# Altium PCB Tube_Driver.PcbDoc (part 2 of 2)
Units mm, origin at the board's own origin, x right, y up, seen from the top; angles counter-clockwise.
Board outline 113 x 87.5 mm, 2 copper layers (Top Layer, Bottom Layer); 135 components, 76 nets, 317 pads, 176 vias.
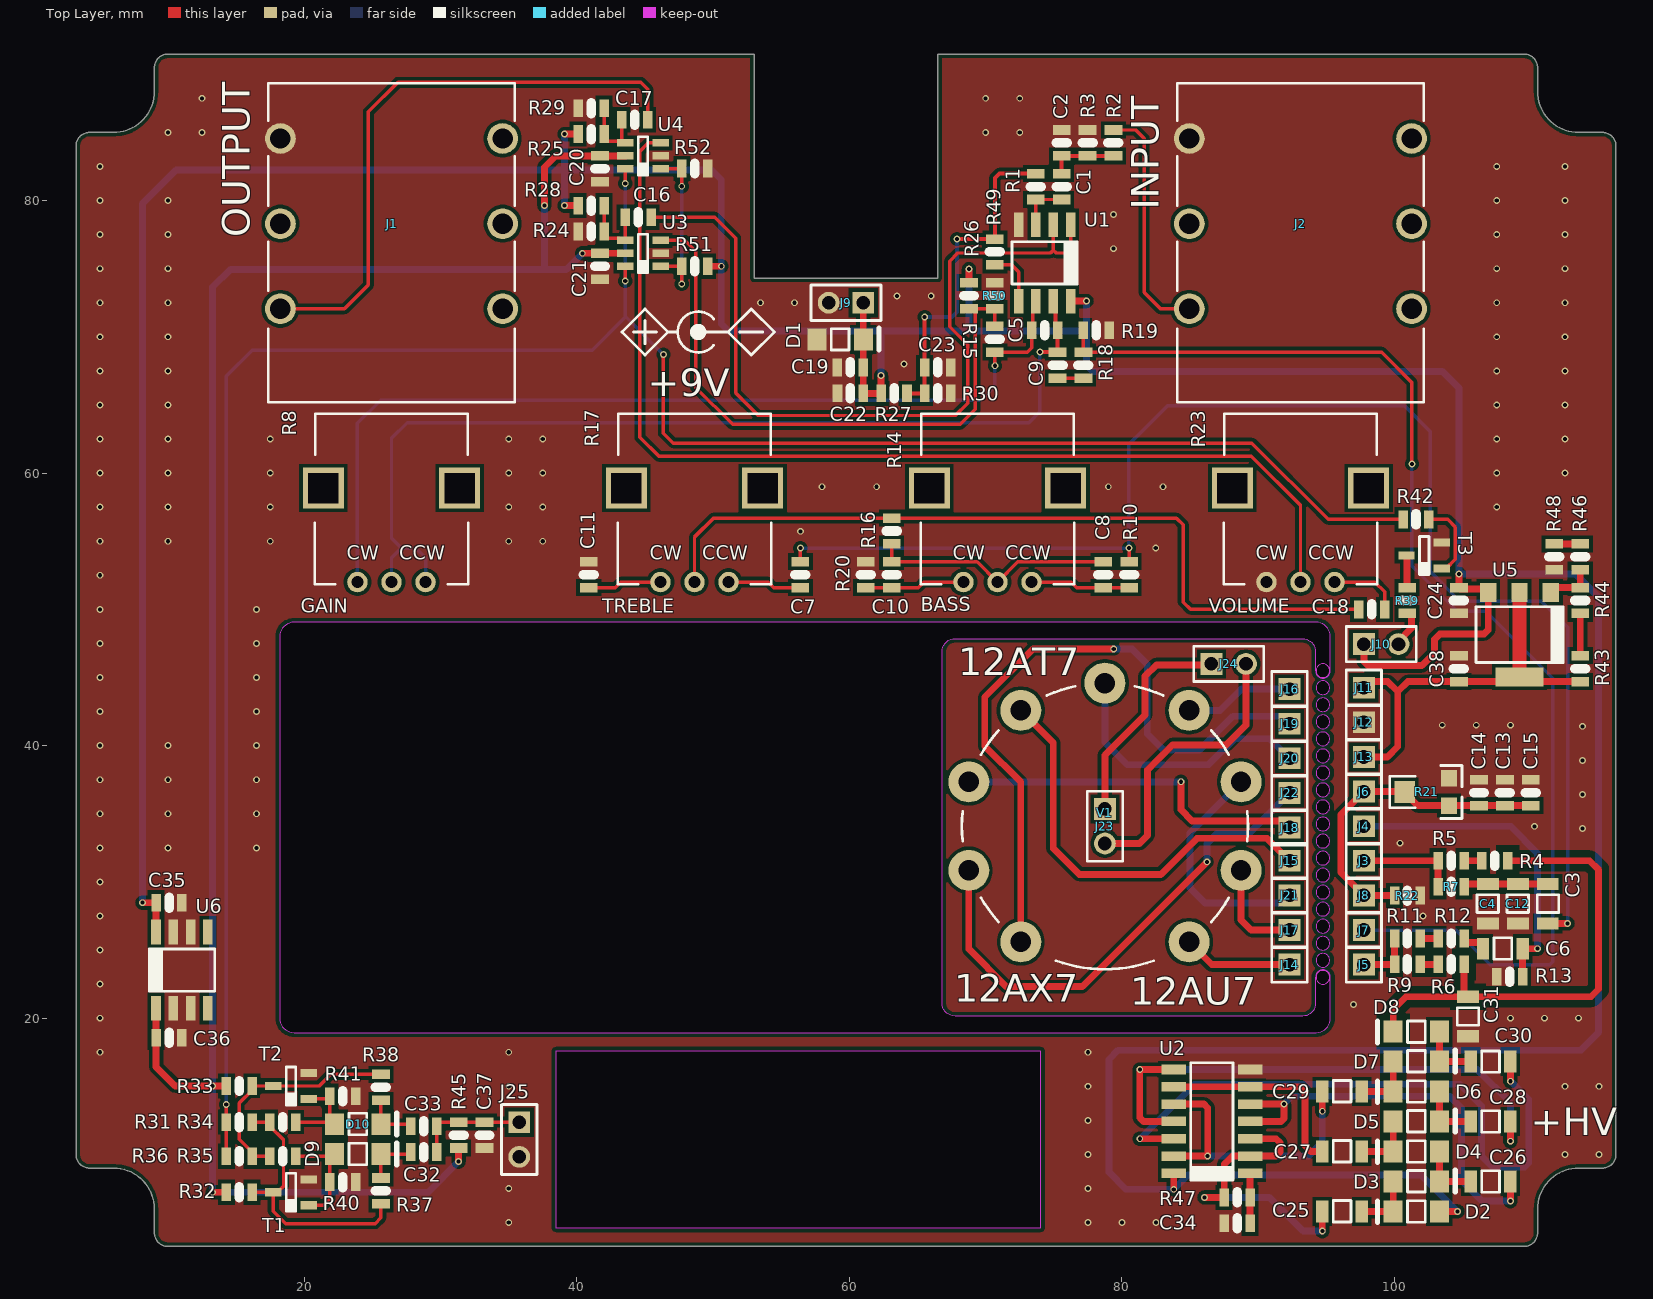
[diagram p0: Top Layer view]

## Via types
v1: diameter 0.5, hole 0.3, Top Layer to Bottom Layer, 176 vias

## Nets (pads, with @x,y where several pads share a name; then routed paths per layer and width w, separated by ;. In a path a pad name is that pad's centre, name@x,y a point inside that pad or via, vN(x,y) a via of type N, cw(c..) or ccw(c..) an arc to the next point about the centre after c; other vN are vias at no path point) (continued)
SET: (continued)
  Top Layer w0.254: R36.2 R31.2 v1(14.275,13.675) ; v1(43.55,74.1) U3.6 ; v1(43.55,81.25) U4.6 ; v1(46.35,68.7) 46.35,62.925 47.075,62.2 89.525,62.2 95.125,56.6 R42.1
  Bottom Layer w0.254: v1(14.275,13.675) 14.275,67.125 16.175,69.025 41.125,69.025 43.55,71.45 v1(43.55,74.1) v1(43.55,81.25) ; 43.55,71.5 v1(46.35,68.7)
pads on no net: J1.2 J1.4 J1.5 J1.6 J2.2 J2.4 J2.5 J2.6 R8. R14. R17. R23. U6.4 U6.5

## Polygon pours and split planes (outlines as drawn)
GND on Top Layer "GND_TOP" (solid, pour order 0): 0,0 120,0 120,95 0,95
GND on Bottom Layer "GND_bottom" (solid, pour order 1): 0,0 120,0 120,95 0,95

## Silkscreen, mask and mechanical layers (free items; w line width, h text height)
Top Overlay:
  circle w1: c48.9,70.35 r0.1
  lines w0.2: 44.15,70.35 45.85,70.35 ; 45,69.5 45,71.2 ; 47.4,70.35 46.7,70.35 ; 48.9,70.35 51.1,70.35 ; 50.049,69.386 cw(c48.9,70.35) 50.049,71.314 ; 51.95,70.35 53.65,70.35 ; 46.7,70.35 45,72.05 43.3,70.35 45,68.65 46.7,70.35 ; 51.1,70.35 52.8,68.65 54.5,70.35 52.8,72.05 51.1,70.35
  text "INPUT" at 82.695,79.305 h2.03 r90
  text "OUTPUT" at 15.995,77.305 h2.03 r90
  text "+9V" at 45.205,65.655 h2.03
  text "BASS" at 65.219,49.852 h1.02
  text "GAIN" at 19.752,49.752 h1.02
  text "TREBLE" at 41.852,49.752 h1.02
  text "VOLUME" at 86.352,49.752 h1.02
  text "12AT7" at 68.005,45.18 h2.03
  text "12AX7" at 67.705,21.205 h2.03
  text "12AU7" at 80.605,21.005 h2.03
  text "+HV" at 110.005,11.405 h2.03
Top Solder:
  text "P: LAMPA V2" at 8.402,44.188 h1.52 r90
  text "D: M.K" at 11.402,44.188 h1.52 r90
  text "09.01.2024" at 14.402,44.188 h1.52 r90
Outline:
  circle w0.1: c94.75,23 r0.5
  circle w0.1: c94.75,26.75 r0.5
  circle w0.1: c94.75,25.5 r0.5
  circle w0.1: c94.75,24.25 r0.5
  circle w0.1: c94.75,30.5 r0.5
  circle w0.1: c94.75,29.25 r0.5
  circle w0.1: c94.75,28 r0.5
  circle w0.1: c94.75,34.25 r0.5
  circle w0.1: c94.75,33 r0.5
  circle w0.1: c94.75,31.75 r0.5
  circle w0.1: c94.75,35.5 r0.5
  circle w0.1: c94.75,36.75 r0.5
  circle w0.1: c94.75,38 r0.5
  circle w0.1: c94.75,39.25 r0.5
  circle w0.1: c94.75,40.5 r0.5
  circle w0.1: c94.75,41.75 r0.5
  circle w0.1: c94.75,43 r0.5
  circle w0.1: c94.75,44.25 r0.5
  circle w0.1: c94.75,45.5 r0.5
  pour cut-out: 94.25,45.5 ccw(c94.75,45.5) 94.75,45 ccw(c94.75,45.5) 95.25,45.5 ccw(c94.75,45.5) 94.75,46 ccw(c94.75,45.5)
  pour cut-out: 94.25,30.5 ccw(c94.75,30.5) 94.75,30 ccw(c94.75,30.5) 95.25,30.5 ccw(c94.75,30.5) 94.75,31 ccw(c94.75,30.5)
  lines w0.1: 66.75,20.9 66.75,47.1 ; 66.75,21.1 ccw(c67.75,21.1) 67.75,20.1 93.25,20.1 ccw(c93.25,21.1) 94.25,21.1 94.25,23 ; 66.75,46.9 cw(c67.75,46.9) 67.75,47.9 ; 67.75,47.899 93.25,47.899 cw(c93.25,46.899) 94.25,46.899 94.25,45.5 ; 95.25,23 95.25,19.999 cw(c94.25,19.999) 94.25,18.999 19.25,18.999 cw(c19.25,19.999) 18.25,19.999 18.25,47.999 cw(c19.25,47.999) 19.25,48.999 94.25,48.999 cw(c94.25,47.999) 95.25,47.999 95.25,45.45
  lines w0.2: 4.249,9 6,9 cw(c6,6) 9,6 9,4.249 ; 4.249,85 6,85 ccw(c6,88) 9,88 9,89.751 ; 4.25,8.999 cw(c4.25,9.999) 3.25,9.999 3.25,84.001 cw(c4.25,84.001) 4.25,85.001 ; 8.999,4.25 ccw(c9.999,4.25) 9.999,3.25 109.501,3.25 ccw(c109.501,4.25) 110.501,4.25 ; 8.999,89.75 cw(c9.999,89.75) 9.999,90.75 53,90.75 53,89.48 53,74.3 61.02,74.3 66.5,74.3 66.5,90.75 109.501,90.75 cw(c109.501,89.75) 110.501,89.75 ; 110.5,4.249 110.5,6 cw(c113.5,6) 113.5,9 115.251,9 ; 110.5,89.751 110.5,88 ccw(c113.5,88) 113.5,85 115.251,85 ; 115.25,8.999 ccw(c115.25,9.999) 116.25,9.999 116.25,84.001 ccw(c115.25,84.001) 115.25,85.001 ; 38.48,4.6 61.02,4.6 74.02,4.6 74.02,17.6 61.02,17.6 38.48,17.6 38.48,4.6
Dimensions:
  lines w0.05: 0,5.5 ccw(c5.5,5.5) 5.5,0 114,0 ccw(c114,5.5) 119.5,5.5 119.5,88.5 ccw(c114,88.5) 114,94 5.5,94 ccw(c5.5,88.5) 0,88.5 0,5.5

## Dimensions
9.999,3.25 to 9.928,90.75 on Dimensions
3.25,9.999 to 116.25,9.999 on Dimensions

## Text inside footprints (layer, text, board x,y; h text height)
R8: Top Overlay "CCW" at 26.952,53.652 h1.02; Top Overlay "CW" at 23.127,53.652 h1.02
R14: Top Overlay "CCW" at 71.419,53.652 h1.02; Top Overlay "CW" at 67.594,53.652 h1.02
R17: Top Overlay "CCW" at 49.185,53.652 h1.02; Top Overlay "CW" at 45.36,53.652 h1.02
R23: Top Overlay "CCW" at 93.652,53.652 h1.02; Top Overlay "CW" at 89.827,53.652 h1.02